# EAGLE board Cing_MainBoard (EAGLE 9.1.0)
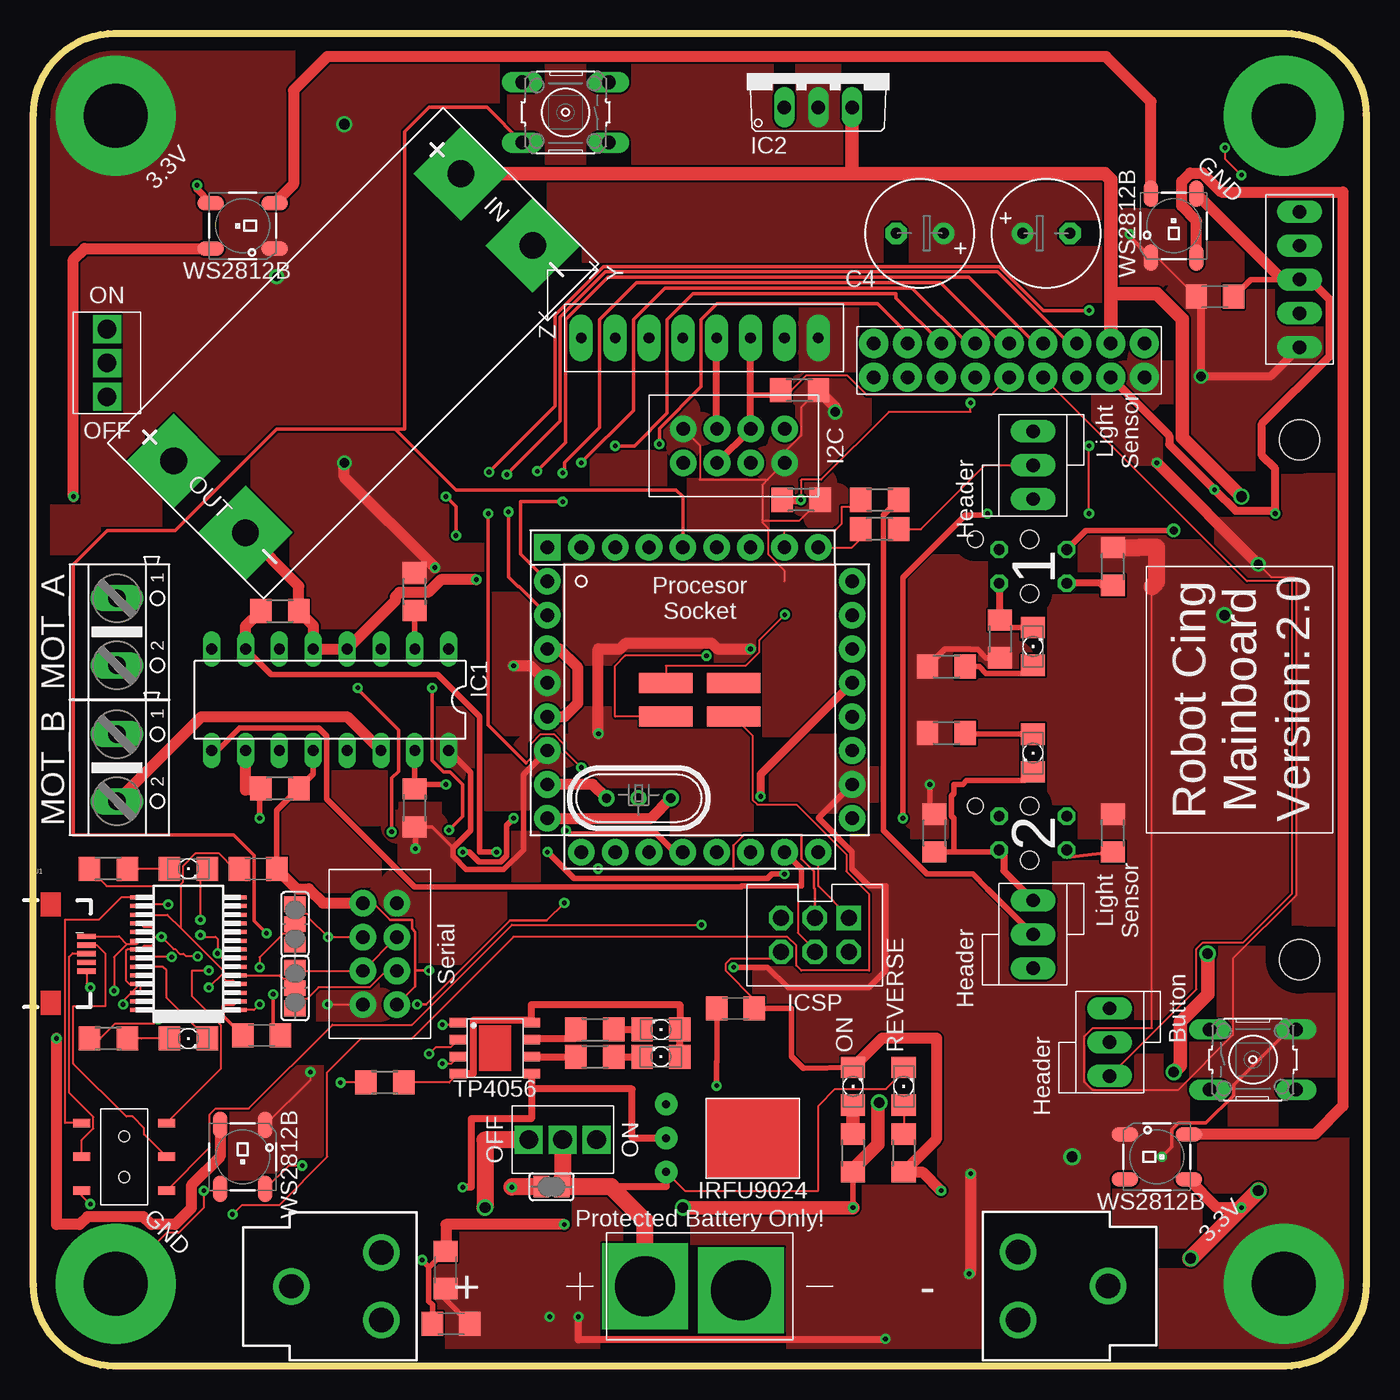
[diagram p0: board, top side]
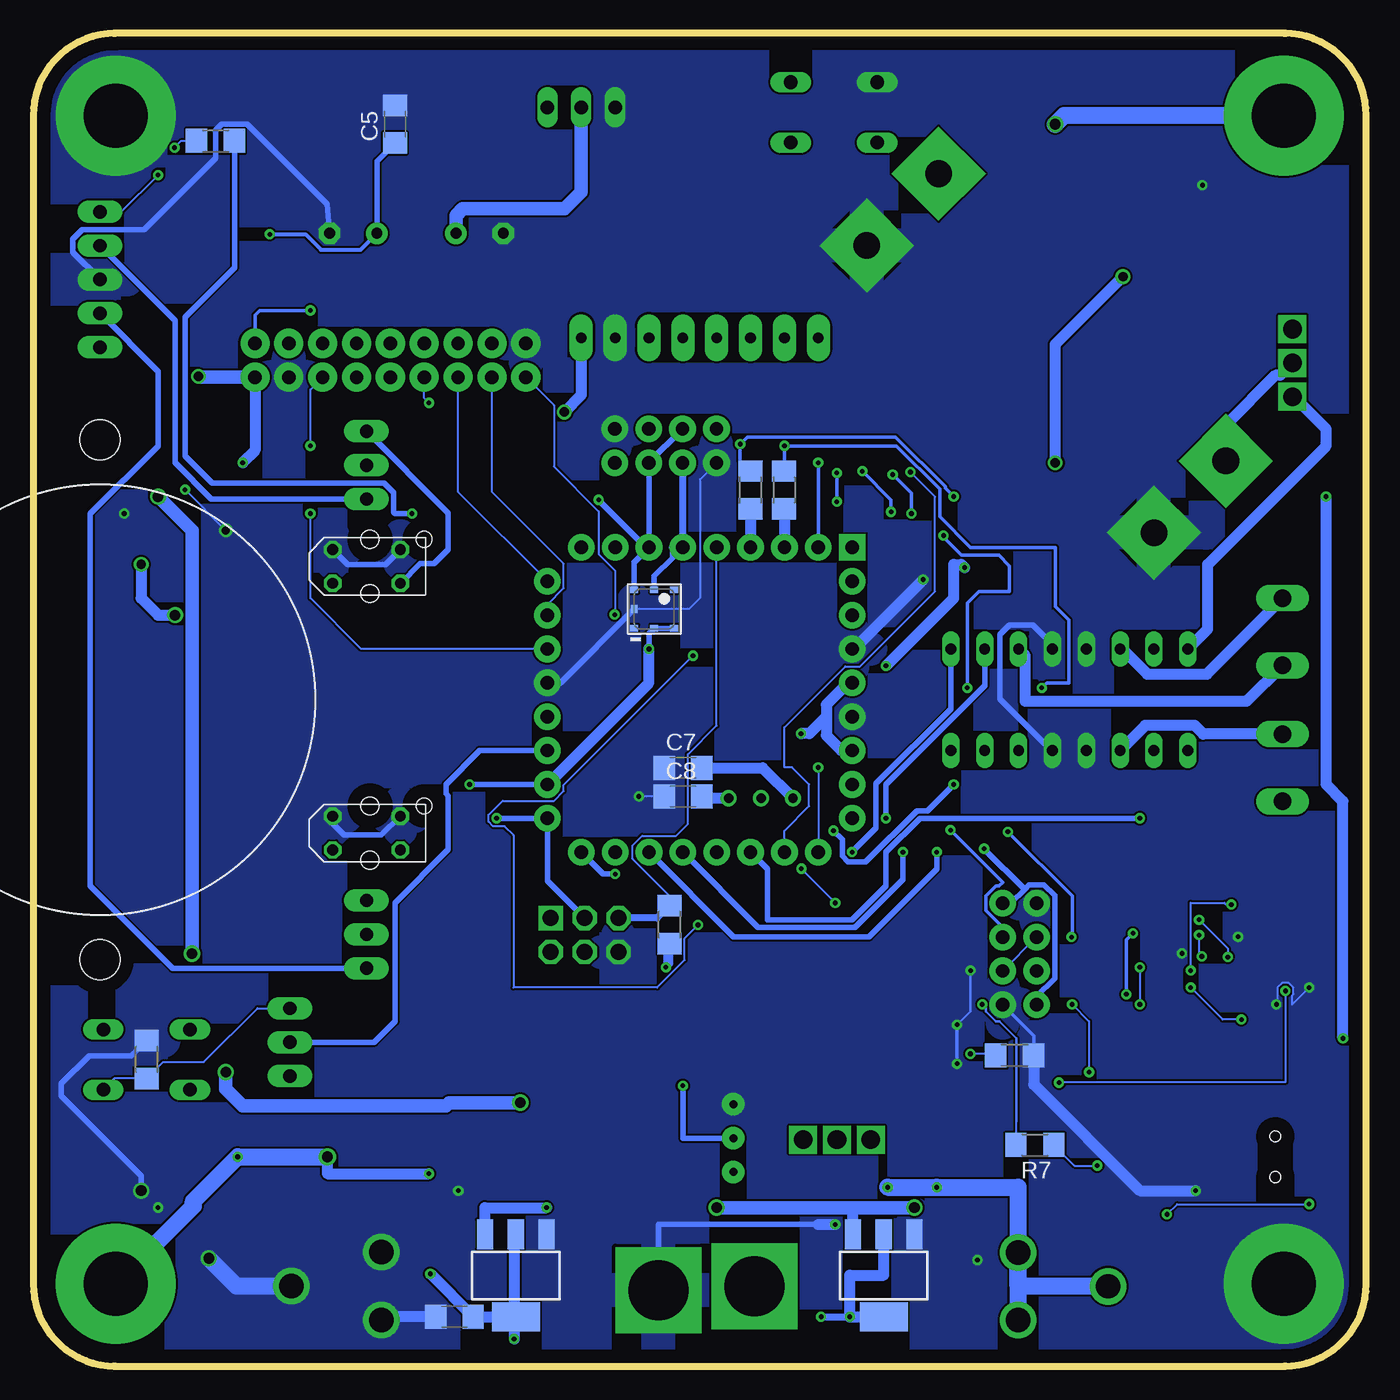
[diagram p1: board, bottom side, seen from below]

Size 100 x 100 mm. Coordinates in mm from the lower left corner, seen from the top.
Outline: 93.84,100 arc-90 100,93.84
Outline: 0,93.84 arc-90 6.16,100
Outline: 6.16,0 arc-90 0,6.16
Outline: 100,6.16 arc-90 93.84,0
Outline: 0,6 0,94
Outline: 6,100 94,100
Outline: 100,94 100,6
Outline: 94,0 6,0
Copper layers (1*16): Top 0.035mm / dielectric 1.5mm / Bottom 0.035mm
Design rules "default": minimum track width 6mil, minimum drill 0.35mm, track to track 6mil, track to pad 6mil, pad to pad 6mil, via to via 6mil, smd to smd 6mil, copper to edge 40mil, drill to drill 6mil, minimum pad ring 10mil, minimum via ring 8mil, stop-mask expansion 4mil, vias tented up to drill 0mil, thermal gap 10mil

## Footprints (pad centres in the part's own frame; a part is rotated, then mirrored left to right if it is on the bottom)
C1206 = smd 1.6 x 1.8: 1 -1.4,0; 2 1.4,0
E3,5-8 = drill 0.813 pad 1.6: + -1.778,0 | drill 0.813 pad 1.6 octagon: - 1.778,0
L293 = drill 0.813 long: 1 -8.89,-3.81; 2 -6.35,-3.81; 3 -3.81,-3.81; 4 -1.27,-3.81; 5 1.27,-3.81; 6 3.81,-3.81; 7 6.35,-3.81; 8 8.89,-3.81; 9 8.89,3.81; 10 6.35,3.81; 11 3.81,3.81; 12 1.27,3.81; 13 -1.27,3.81; 14 -3.81,3.81; 15 -6.35,3.81; 16 -8.89,3.81
LM1117T = drill 1.016 long: 1 -2.54,-2.54; 2 0,-2.54; 3 2.54,-2.54
FT232RL = smd 0.3 x 1.5: 1 -4.225,-3.625; 2 -3.575,-3.625; 3 -2.925,-3.625; 4 -2.275,-3.625; 5 -1.625,-3.625; 6 -0.975,-3.625; 7 -0.325,-3.625; 8 0.325,-3.625; 9 0.975,-3.625; 10 1.625,-3.625; 11 2.275,-3.625; 12 2.925,-3.625; 13 3.575,-3.625; 14 4.225,-3.625; 15 4.225,3.625; 16 3.575,3.625; 17 2.925,3.625; 18 2.275,3.625; 19 1.625,3.625; 20 0.975,3.625; 21 0.325,3.625; 22 -0.325,3.625; 23 -0.975,3.625; 24 -1.625,3.625; 25 -2.275,3.625; 26 -2.925,3.625; 27 -3.575,3.625; 28 -4.225,3.625
IRFU9024 = drill 0.6 pad 1.676: D 0,0; G -2.54,0; S 2.54,0
ICSP_HEADER = drill 1.2 pad 1.829 square: 1 -1.27,2.54 | drill 1.2 pad 1.829 octagon: 2 1.27,2.54; 3 -1.27,0; 4 1.27,0; 5 -1.27,-2.54; 6 1.27,-2.54
1206 = smd 1.6 x 1.803: A -1.422,0; C 1.422,0
WS2812B = smd 2 x 1.1: 1 -2.4,1.7; 2 -2.4,-1.7; 3 2.4,-1.7; 4 2.4,1.7
TCRT5000 = drill 0.8 octagon: A -2.54,1.27; C 2.54,1.27; E 2.54,-1.27; K -2.54,-1.27 | hole 1.35: 0.254,-2.032; 0.254,2.032 | hole 1.2: 4.318,-2.032
AK500/2 = drill 1.321 long: 1 -2.515,0; 2 2.515,0
HC49U = drill 0.7 pad 1.2: 1 -2.413,0; 2 -0.027,0; 3 2.413,0
R1206 = smd 1.6 x 1.803: 1 -1.422,0; 2 1.422,0
B3F-10XX = drill 1.016 long: 1 -3.251,2.261; 2 3.251,2.261; 3 -3.251,-2.261; 4 3.251,-2.261
SJ = smd 1.168 x 1.6: 1 -0.762,0; 2 0.762,0
SJ_2 = smd 1.168 x 1.6: 1 -1.524,0; 2 0,0; 3 1.524,0
USB_SWITCH = smd 1.27 x 0.635: CH1A -3.175,2.54; CH1B -3.175,-2.54; CH2A 3.175,2.54; CH2B 3.175,-2.54; COM1 -3.175,0; COM2 3.175,0 | hole 0.813: 0,1.524; 0,-1.524
TP4056 = smd 1.3 x 0.7: 1 -2.75,1.905; 2 -2.75,0.635; 3 -2.75,-0.635; 4 -2.75,-1.905; 5 2.75,-1.905; 6 2.75,-0.635; 7 2.75,0.635; 8 2.75,1.905
USB-MICRO-SMD = smd 1.4 x 0.4: D+1 2.7,0; D-1 2.7,0.65; GND1 2.7,-1.3; ID1 2.7,-0.65; VBUS1 2.7,1.3
BMP180 = smd 0.6 x 0.5: 1 1.5,1.45; 2 0,1.45; 3 -1.5,1.45; 4 -1.5,-1.45; 5 0,-1.45; 6 1.5,-1.45 | smd 0.5 x 0.6: 7 1.5,0
MPU-6050 = drill 0.8 pad 1.778 long: ADO 0,-6.35; GND 0,6.35; INT 0,-8.89; SCL 0,3.81; SDA 0,1.27; VCC 0,8.89; XCL 0,-3.81; XDA 0,-1.27
PROCESSOR-SOCKET_PCB = smd 4 x 1.5: 32 2.54,1.27; 36 -2.54,1.27; D+ 2.54,-1.27; D- -2.54,-1.27 | drill 1 pad 2: A0 11.43,6.35; A1 11.43,8.89; A2 8.89,11.43; A3 6.35,11.43; A4 3.81,11.43; A5 1.27,11.43; A6 11.43,-3.81; A7 11.43,3.81; AREF 11.43,-1.27; CRYST1 -11.43,-6.35; CRYST2 -11.43,-8.89; D0 -3.81,11.43; D1 -6.35,11.43; D2 -8.89,11.43; D3 -11.43,8.89; D4 -11.43,6.35; D5 -8.89,-11.43; D6 -6.35,-11.43; D7 -3.81,-11.43; D8 -1.27,-11.43; D9 1.27,-11.43; D10 3.81,-11.43; D11 6.35,-11.43; D12 8.89,-11.43; D13 11.43,-8.89; GND -11.43,3.81; GND2 -11.43,-1.27; GND3 11.43,1.27; RESET -1.27,11.43; VCC -11.43,1.27; VCC2 -11.43,-3.81; VCC3 11.43,-6.35 | drill 1 pad 2 square: P$1 -11.43,11.43
BIG_HEADER = drill 1 pad 2.184: +3V3 1.27,10.16; +5V -1.27,7.62; +5V1 1.27,-10.16; A0 1.27,-7.62; A1 1.27,-5.08; A4 1.27,-2.54; A5 1.27,0; A6 1.27,2.54; A7 1.27,5.08; D0 -1.27,-7.62; D1 -1.27,-5.08; D2 -1.27,-2.54; D3 -1.27,0; D4 -1.27,2.54; D5 -1.27,5.08; D6 -1.27,10.16; GND -1.27,-10.16; GND2 1.27,7.62
I2_HEADER = drill 1 pad 2: 5V 1.27,3.81; +5V -1.27,-3.81; GND1 -1.27,3.81; GND2 1.27,-3.81; SCL 1.27,-1.27; SCL2 -1.27,1.27; SDA 1.27,1.27; SDA2 -1.27,-1.27
SERIAL_HEADER = drill 1 pad 2: 5V 1.27,3.81; +5V -1.27,-3.81; GND -1.27,3.81; GND2 1.27,-3.81; RXD -1.27,-1.27; RXD2 1.27,1.27; TXD -1.27,1.27; TXD2 1.27,-1.27
SWITCH = drill 1.4 square: COM 0,0; OFF 2.54,0; ON -2.54,0
BATTERY_CONECTOR_D = drill 4.5 pad 6.452 square: + 4.1,0; - -3.1,0.3
BATTERY_18650-HOLDER = drill 1.829: GND@1 30.628,0.01; GND@2 23.88,2.55; GND@3 23.88,-2.53; PWR@1 -30.628,-0.01; PWR@2 -23.88,2.53; PWR@3 -23.88,-2.55
LM1117 = smd 1.219 x 2.235: 1 -2.311,-3.099; 2 0,-3.099; 3 2.311,-3.099 | smd 3.6 x 2.2: TAB 0,3.099
CONNECTOR_1X5 = drill 1 pad 1.676 long: +5V 0,-5.08; A1 0,5.08; A2 0,2.54; A3 0,-2.54; GND 0,0
CONNECTOR_LIGHT_SENSOR = drill 1 pad 1.676 long: COM 0,0; HEADER 0,-2.54; LIGHTSENSOR 0,2.54
CONNECTOR_BUTTON = drill 1 pad 1.676 long: BUTTON 0,2.54; COM 0,0; HEADER 0,-2.54
LEGO-1X1 = drill 4.8 pad 9: LEGO 0,0
BALL = hole 3: 0,19.5; 0,-19.5
DC-DC-STEP-UP-MT3608 = drill 2 pad 5 square: IN+ 15.24,3.81; IN- 15.24,-3.81; OUT+ -15.24,3.81; OUT- -15.24,-3.81

## Placement (x,y rotation side)
C1  100n  [C1206]  52.69,26.83 0 top
C2  100n  [C1206]  16.87,37.32 0 top
C3  100n  [C1206]  17.12,24.8 0 top
C4  100uf  [E3,5-8]  66.51,85 180 top
C5  100n  [C1206]  72.86,93.18 90 bottom
C6  100uf  [E3,5-8]  76,85 0 top
C7  22p  [C1206]  51.26,44.9 0 bottom
C8  22p  [C1206]  51.26,42.74 0 bottom
C10  100n  [C1206]  31.34,3.19 180 top
C11  100n  [C1206]  68.41,3.72 0 bottom
C12  100n  [C1206]  30.92,7.22 90 top
C13  100n  [C1206]  88.65,80.23 0 top
IC1  L293D  [L293]  22.27,50 180 top
IC2  LM1117T3.3-V  [LM1117T]  58.89,96.99 0 top
IC3  FT232RL  [FT232RL]  11.63,30.95 90 top
IRFU9024  IRFU9024  [IRFU9024]  47.48,17.11 270 top
JP1  ICSP  [ICSP_HEADER]  58.64,32.35 270 top
LED1  Charging  [1206]  47.09,25.25 180 top
LED3  RXD  [1206]  11.63,37.32 0 top
LED5  WS2812B  [WS2812B]  15.71,15.71 270 top
LED6  WS2812B  [WS2812B]  15.71,85.56 180 top
LED7  WS2812B  [WS2812B]  85.56,85.56 90 top
LED8  WS2812B  [WS2812B]  84.29,15.71 0 top
LS1  1  [TCRT5000]  75,60 180 top
LS2  2  [TCRT5000]  75,40 180 top
MOT_A  [AK500/2]  6.27,55.1 270 top
MOT_B  [AK500/2]  6.27,44.9 270 top
ON  GREEN  [1206]  61.5,21 90 top
Q1  16mhz  [HC49U]  45.42,42.61 0 top
R1  10k  [R1206]  52.27,33.12 270 bottom
R2  10k  [R1206]  91.5,23 270 bottom
R3  40  [R1206]  26.37,21.28 0 top
R4  1k2  [R1206]  26.37,23.31 0 bottom
R5  1k  [R1206]  42.13,25.25 180 top
R6  1k  [R1206]  65.3,16 90 top
R7  1k  [R1206]  24.85,16.6 180 bottom
R8  1k  [R1206]  43.67,65.74 90 bottom
R9  1k  [R1206]  46.21,65.74 90 bottom
R10  1k  [R1206]  68.5,52.5 180 top
R11  1k  [R1206]  42.13,23.22 180 top
R12  10k  [R1206]  18.5,43.35 0 top
R13  10k  [R1206]  28.61,41.88 270 top
R14  10k  [R1206]  28.61,58.11 270 top
R15  10k  [R1206]  18.5,56.65 180 top
R16  100  [R1206]  81,40 270 top
R17  1k  [R1206]  67.6,40 270 top
R18  100  [R1206]  81,60 270 top
R19  1k  [R1206]  72.53,54.56 90 top
R20  1k  [R1206]  68.5,47.5 180 top
R22  1k  [R1206]  61.5,16 90 top
R24  330  [R1206]  5.63,37.32 0 top
R25  330  [R1206]  5.63,24.58 0 top
R26  1k  [R1206]  86.33,91.93 180 bottom
R27  1k  [R1206]  63.5,62.8 0 top
R28  1k  [R1206]  63.5,65 180 top
R30  10k  [R1206]  57.48,73.22 0 top
R31  10k  [R1206]  57.61,65 0 top
REVERSE  RED  [1206]  65.3,21 90 top
S2  Reset  [B3F-10XX]  39.93,94.07 180 top
S4  Button  [B3F-10XX]  91.5,23 0 top
SJ1  [SJ]  38.88,13.47 0 top
SJ2  [SJ_2]  19.64,33.15 90 top
SJ3  [SJ_2]  19.64,28.37 90 top
SW1  [USB_SWITCH]  6.82,15.71 180 top
TP4056  TP4056  [TP4056]  34.63,23.86 0 top
TXD  TXD  [1206]  11.63,24.58 0 top
TXD1  LightSensor 1  [1206]  75,54 90 top
TXD2  LightSensor 2  [1206]  75,46 270 top
U1  [USB-MICRO-SMD]  1.3,30.95 0 top
U2  BMP180  [BMP180]  53.42,56.81 180 bottom
U3  MPU-6050MPU6050  [MPU-6050]  50,77.16 270 top
U$1  PROCESSOR-SOCKET_PCB  [PROCESSOR-SOCKET_PCB]  50,50 0 top
U$2  BIG_HEADER  [BIG_HEADER]  73.21,75.47 270 top
U$3  I2C_HEADER  [I2_HEADER]  52.56,69.05 270 top
U$4  SERIAL_HEADER  [SERIAL_HEADER]  26,30.93 180 top
U$5  SWITCH  [SWITCH]  5.53,75.27 90 top
U$7  BATTERY_CONECTOR_D  [BATTERY_CONECTOR_D]  50,6 180 top
U$8  BATTERY_18650-HOLDER  [BATTERY_18650-HOLDER]  50,6 0 top
U$9  SWITCH  [SWITCH]  39.71,17 0 top
U$10  LM1117  [LM1117]  63.8,6.8 180 bottom
U$11  LM1117  [LM1117]  36.2,6.8 180 bottom
U$12  CONNECTOR_1X5  [CONNECTOR_1X5]  95,81.53 0 top
U$13  CONNECTOR_LIGHT_SENSOR  [CONNECTOR_LIGHT_SENSOR]  75,67.6 0 top
U$14  CONNECTOR_LIGHT_SENSOR  [CONNECTOR_LIGHT_SENSOR]  75,32.4 0 top
U$15  CONNECTOR_BUTTON  [CONNECTOR_BUTTON]  80.76,24.31 0 top
U$16  3.3V  [LEGO-1X1]  6.16,93.84 0 top
U$17  3.3V  [LEGO-1X1]  93.84,6.16 0 top
U$18  GND  [LEGO-1X1]  6.16,6.16 0 top
U$19  GND  [LEGO-1X1]  93.84,93.84 0 top
U$20  BALL  [BALL]  95,50 0 top
U$21  DC-DC-STEP-UP-MT3608  [DC-DC-STEP-UP-MT3608]  24,76 45 top
VERSION  2.0  [VERSION]  97.5,50 90 top
YELLOW  Full  [1206]  47.09,23.22 180 top

## Library data of the parts
C1-C8 C10-C13 = rcl; SPICEPREFIX: C
IC1 = Cing Library; MPN: L293D; OC_FARNELL: 9589619; OC_NEWARK: 56P8249
IC2 IC3 IRFU9024 JP1 LED5-LED8 LS1 LS2 SW1 TP4056 U1-U3 U$1-U$5 U$7-U$21 VERSION = Cing Library
LED1 LED3 ON REVERSE TXD TXD1 TXD2 YELLOW = led
MOT_A MOT_B = con-ptr500; OC_FARNELL: unknown; OC_NEWARK: unknown
Q1 = crystal; OC_FARNELL: unknown; OC_NEWARK: unknown
R1-R20 R22 R24-R28 R30 R31 = rcl; SPICEPREFIX: R
S2 S4 = switch-omron; MPN: B3F-1000; OC_FARNELL: 176432; OC_NEWARK: 36M3542
SJ1-SJ3 = jumper

## Nets
36: U$1.36 U$2.+5V1
+3V3: C4.+ C5.1 C6.+ C10.1 C11.2 C12.1 C13.1 IC1.16 IC2.2 LED5.1 LED6.1 LED7.1 LED8.1 R1.2 R10.2 R13.2 R14.1 R16.1 R17.1 R18.1 R19.1 R20.2 R30.2 R31.2 S4.2 U2.2 U2.3 U3.VCC U$1.VCC U$1.VCC2 U$1.VCC3 U$2.+3V3 U$3.5V U$3.+5V U$4.5V U$4.+5V U$10.2 U$10.TAB U$11.2 U$11.TAB U$12.+5V U$16.LEGO U$17.LEGO
A0: U$1.A0 U$2.A0
A1: U$1.A1 U$2.A1
A2: R27.1 U$1.A2
A3: R28.2 U$1.A3
A6: U$1.A6 U$15.COM
ATMEGA_D+: SW1.CH2A U$1.D+
ATMEGA_D-: SW1.CH1A U$1.D-
BAT+: IC2.3 R22.1 U$2.+5V U$9.ON U$10.3 U$11.3 U$21.IN+
BUTTON: R2.2 S4.4 U$15.BUTTON
D2: U$1.D2 U$2.D2
D3: U$1.D3 U$2.D3
D4: U$1.D4 U$2.D4
D5: U$1.D5 U$2.D5
D6: U$1.D6 U$2.D6
D+: IC3.15 SW1.CH2B
D-: IC3.16 SW1.CH1B
GND: C1.2 C2.2 C4.- C5.2 C6.- C7.1 C8.1 C10.2 C11.1 C12.2 C13.2 IC1.4 IC1.5 IC1.12 IC1.13 IC2.1 IC3.7 IC3.18 IC3.21 IC3.25 IC3.26 IRFU9024.G JP1.6 LED5.3 LED6.3 LED7.3 LED8.3 LS1.E LS1.K LS2.E LS2.K ON.C R2.1 R4.2 R6.1 R12.2 R15.1 S2.4 TP4056.1 TP4056.3 U1.GND1 U2.7 U3.GND U$1.GND U$1.GND2 U$1.GND3 U$2.GND U$2.GND2 U$3.GND1 U$3.GND2 U$4.GND U$4.GND2 U$7.- U$8.GND@1 U$8.GND@2 U$8.GND@3 U$10.1 U$11.1 U$12.GND U$18.LEGO U$19.LEGO U$21.IN- U$21.OUT-
HD_A6: U$2.A6 U$15.HEADER
HD_A7: U$1.A7 U$2.A7
IN_A1: IC1.2 R14.2 U$1.D10
IN_A2: IC1.7 R15.2 U$1.D9
IN_B1: IC1.15 R13.1 U$1.D8
IN_B2: IC1.10 R12.1 U$1.D7
IRFU: C1.1 IRFU9024.D SJ1.1 TP4056.5 U$8.PWR@1 U$8.PWR@2 U$8.PWR@3
MISO: IC1.1 JP1.1 U$1.D12
MOSI: IC1.9 JP1.4 U$1.D11
MOT_A+: IC1.3 MOT_A.2
MOT_A-: IC1.6 MOT_A.1
MOT_B+: IC1.14 MOT_B.2
MOT_B-: IC1.11 MOT_B.1
N$1: LED5.2 LED6.4
N$2: LED6.2 LED7.4
N$3: R8.1 U$1.D1
N$4: IC1.8 U$5.ON
N$5: R6.2 REVERSE.A
N$6: R9.1 U$1.D0
N$7: C8.2 Q1.3 U$1.CRYST2
N$8: SW1.COM1 U1.D-1
N$9: LED1.C R5.1
N$10: R28.1 U$14.COM
N$11: LED7.2 LED8.4
N$12: LED5.4 R7.1
N$13: SW1.COM2 U1.D+1
N$14: C7.2 Q1.1 U$1.CRYST1
N$15: R10.1 TXD1.A
N$16: R11.1 YELLOW.C
N$17: R20.1 TXD2.A
N$18: R11.2 TP4056.6
N$19: R5.2 TP4056.7
N$20: LS2.A R16.2
N$22: LS1.A R18.2
N$24: LS1.C R19.2 TXD1.C U$13.LIGHTSENSOR
N$25: LED1.A R3.2 TP4056.4 TP4056.8 YELLOW.A
N$27: R4.1 TP4056.2
N$28: IRFU9024.S REVERSE.C SJ1.2 U$7.+ U$9.COM
N$29: ON.A R22.2
N$31: U$12.A2 U$13.HEADER
N$32: LED3.A R24.2
N$33: IC3.22 LED3.C
N$34: R25.2 TXD.A
N$36: C3.1 IC3.2
N$37: IC3.5 SJ3.2
N$38: IC3.1 SJ2.2
N$39: C2.1 IC3.4 IC3.17 R24.1 R25.1
N$40: U$12.A3 U$14.HEADER
N$42: R26.2 U$12.A1
N$43: R27.2 U$13.COM
N$45: LS2.C R17.2 TXD2.C U$14.LIGHTSENSOR
RESET: C3.2 JP1.5 R1.1 S2.2 U$1.RESET
RXD: R9.2 SJ2.1 SJ3.3 U$2.D0 U$4.RXD U$4.RXD2
SCK: JP1.3 R7.2 R26.1 U$1.D13
SCL: R30.1 U2.5 U3.SCL U$1.A5 U$2.A5 U$3.SCL U$3.SCL2
SDA: R31.1 U2.6 U3.SDA U$1.A4 U$2.A4 U$3.SDA U$3.SDA2
T: IC3.23 TXD.C
TXD: R8.2 SJ2.3 SJ3.1 U$2.D1 U$4.TXD U$4.TXD2
VCC_MOT: U$5.COM U$21.OUT+
VUSB: IC3.20 R3.1 U1.VBUS1

## Tracks (layer width: path | path; a pad name or v marks a point on that pad's centre or on a via)
36  (via drill 0.35)
  Top 0.152: v56.38,56.38 54.45,54.45 54.45,53.55 53.44,52.54 47.46,52.54 U$1.36
  Bottom 0.152: U$2.+5V1 60.94,72.09 60.94,67.5 57.58,64.13 57.58,60.92 56.35,59.69 56.35,56.35 v56.38,56.38
+3V3  (via drill 0.35, 0.7, 0.8, 0.8 pad 1, 0.8 pad 1.3)
  Top 0.152: 87.62,79.86 C13.1 84.32,83.16 LED7.1 | R30.2 57.6,71.91 57.6,69.81 56.37,68.59 U$3.5V 55.09,66.5 | 55.09,66.5 54.7,66.11 54.7,63.55 | R31.2 57.5,63.46 54.7,63.46 54.7,63.55 | 54.7,63.55 54.7,63.3 55.12,62.87 55.12,60.92 56.35,59.69 56.35,58.89 | U$3.+5V 50,69.07 50,66.51 50.01,66.5 55.09,66.5 | U$4.5V 22.08,27.12 v22.06,27.14 | LED5.1 20.79,21.49 v20.79,22.06 | v84.29,67.78 92.88,59.2 94.58,59.2 94.75,59.02 94.75,35.33 90,30.58 90,24.85 85.85,20.7 79.48,20.7 78.86,21.33 78.86,24.75 79.48,25.38 83.94,25.38 83.94,58.49
  Top 0.254: 31.49,38.87 29.9,40.46 R13.2 | S4.2 94.22,25.26 90.05,21.09 90.05,20.31 87.98,18.24 85.9,18.24 85.41,17.75 85.41,16.45 v84.67,15.71
  Top 0.305: LED7.1 82.26,84.76 v82.26,84.92
  Top 0.406: C12.1 30.92,5.01 C10.1 | v28.66,38.82 28.66,40.41 R13.2 | IC1.16 32.8,44.55 32.8,40.19 31.49,38.87 31.49,38.27 32.48,37.28 35.3,37.28 36.76,38.75 36.76,44.38 U$1.VCC2 | R17.1 67.27,41.75 v67.27,43.65 | U$1.VCC3 58.9,41.12 61.43,38.58 61.43,37.3 62.7,36.03 63.97,36.03 63.97,29.68 62.7,28.41 56.6,28.41 55.08,29.93 v52.54,29.93 | R19.1 71.48,53.14 70.87,53.76 70.37,53.76 70.32,53.81 68.39,53.81 R10.2
  Top 0.508: v40.9,3.7 40.9,1.97 64.01,1.97 v63.93,2.05
  Top 0.61: 87.62,79.86 v87.62,74.26 92.81,74.26 U$12.+5V
  Top 0.813: v84.29,67.78 v91.91,60.16 | U$1.VCC 37.3,52.54 v36.03,52.54 | v30.14,59.91 23.33,66.72 v23.33,67.78 | R30.2 60.16,71.97 v60.16,71.59 | v70.32,14.44 70.32,7.04 v70.21,6.93 | v42.4,47.46 42.38,47.48 42.38,53.81 44.02,53.81 44.45,54.24 50.9,54.24 51.33,53.81 v53.81,53.81
  Top 1.27: R18.1 83.01,61.42 83.02,61.43 84.29,61.43 84.29,58.84 83.94,58.49
  Bottom 0.152: v87.62,74.26 87.56,74.2 | v22.06,27.14 20.79,25.87 v20.79,22.06
  Bottom 0.305: v82.26,84.92 79.57,84.92 78.42,83.77 75.45,83.77 C6.+
  Bottom 0.406: v53.81,53.81 53.81,54.97 U2.2 U2.3 | U$4.5V 24.73,27.74 23.37,29.1 23.37,35.3 24.17,36.1 25.29,36.1 25.61,35.77 | U$4.+5V 26.65,34.74 25.61,35.77 | 25.61,35.77 v28.66,38.82 | v67.27,43.65 U$1.VCC3 | R1.2 52.54,31.42 v52.54,29.93 | C5.1 74.22,90.42 C6.+
  Bottom 0.508: v40.9,3.7 v38.74,3.7 | v52.54,29.93 52.27,30.21 R1.2
  Bottom 0.813: U$2.+3V3 83.37,68.7 v84.29,67.78 | v91.91,60.16 91.91,57.62 90.64,56.35 v89.37,56.35 | v36.03,52.54 30.95,57.62 30.95,60.16 30.38,60.16 v30.14,59.91 | 40.51,48.73 40.51,49.63 38.87,51.27 U$1.VCC | 40.51,48.73 40.51,47.32 39.38,46.19 U$1.VCC2 | 40.51,48.73 41.78,47.46 v42.4,47.46 | v23.33,67.78 23.33,76.67 v18.25,81.75 | U3.VCC 58.89,72.86 v60.16,71.59 | U$1.VCC3 53.81,51.27 v53.81,53.81 | U$11.TAB v38.74,3.7 38.74,6.82 36.2,6.82 U$11.2 | 63.93,3.72 C11.2 v70.21,6.93 | 63.93,3.72 63.93,3.57 U$10.TAB 63.93,3.7 v63.93,2.05 | U$10.2 63.93,9.9 63.93,3.72 | v77.94,15.71 77.94,14.44 v70.32,14.44
  Bottom 1.016: U$2.+3V3 87.56,74.2 | IC2.2 58.89,88.1 60.16,86.83 67.78,86.83 68.29,86.32 C4.+
  Bottom 1.27: U$17.LEGO 88,12 88,12.38 v84.67,15.71 v77.94,15.71 | U$16.LEGO 22.68,93.84 v23.33,93.18
  pour Top: -4.61,107.15 107.15,107.15 107.15,-3.34 -7.15,-3.34 -7.15,105.88 -5.88,107.15
A0
  Bottom 0.152: U$1.A0 61.43,57.15 60.2,58.38 60.2,60.2 65.59,65.59 U$2.A0
A1
  Bottom 0.152: U$1.A1 68.13,65.59 U$2.A1
A2
  Top 0.152: U$1.A2 61.43,61.43 62.08,62.08 R27.1
A3
  Top 0.152: U$1.A3 56.35,62.7 60.16,62.7 60.67,63.21 60.67,64.48 61.56,64.48 R28.2
A6
  Bottom 0.406: U$15.COM 74.42,24.31 72.86,25.87 72.86,34.76 68.86,38.76 68.86,42.79 69.05,42.97 69.05,43.65 66.51,46.19 U$1.A6
ATMEGA_D+  (via drill 0.35)
  Top 0.152: U$1.D+ 53.96,47.31 53.96,42.49 54.32,42.13 57.27,42.13 61,38.4 61,37.12 62.7,35.42 62.7,29.68 57.62,29.68 57.24,30.06 57.24,31.55 56.57,32.22 36.03,32.22 28.41,24.6 24.6,24.6 22.06,22.06 22.06,15.71 18.43,12.08 15.64,12.08 v14.95,11.39 | v4.28,12.16 3.65,12.8 SW1.CH2A
  Bottom 0.152: v14.95,11.39 14.18,12.16 v4.28,12.16
ATMEGA_D-  (via drill 0.35)
  Top 0.152: SW1.CH1A 13.23,16.41 13.23,18.88 13.69,19.34 16.16,19.34 22.44,25.62 28.41,25.62 35.9,33.11 v50.13,33.11 | v50.51,53.3 44.41,53.3 43.65,52.54 43.65,48.73 U$1.D-
  Bottom 0.152: v50.13,33.11 51.14,32.1 51.14,30.48 53.21,28.41 63.97,28.41 63.97,39.84 64.63,40.5 65.49,40.5 65.85,40.86 65.85,41.36 64.79,42.42 60.92,42.42 60.2,43.14 60.2,43.61 v50.51,53.3
BAT+  (via drill 0.35, 0.8, 0.8 pad 1)
  Top 0.406: v61.49,11.9 v61.48,11.91 R22.1
  Top 1.016: v61.49,11.9 v48.73,11.9 | R22.1 61.5,14.79 63.36,16.64 63.36,19.67 v63.46,19.77 | v85.56,22.06 86.06,22.56 86.06,25.85 88.1,27.89 v88.1,30.95 | v90.64,65.24 86.19,69.69 86.19,78.58 84.29,80.48 80.83,80.48 | U$2.+5V 80.83,80.48 | 80.83,80.48 80.83,89.02 80.38,89.47 61.43,89.47 | 61.43,89.47 U$21.IN+ | IC2.3 61.43,89.47
  Top 1.27: U$9.ON 34.76,17 34.76,16.98 33.89,16.98 v33.89,11.9
  Bottom 0.813: U$11.3 38.51,11.84 38.57,11.9 | U$10.3 66.11,11.9 v61.49,11.9
  Bottom 1.016: v48.73,11.9 38.57,11.9 v33.89,11.9 | v63.46,19.77 68.8,19.77 69.05,19.52 84.29,19.52 85.56,20.79 v85.56,22.06 | v88.1,30.95 88.1,62.7 v90.64,65.24
BUTTON
  Bottom 0.152: S4.4 93.91,21.58 R2.2 90.26,22.82 87.21,22.82 83.18,26.85 U$15.BUTTON
D2  (via drill 0.35)
  Top 0.254: U$2.D2 70.07,76.74 65.92,80.89 47.38,80.89 45.02,78.53 45.02,71.69 v41.11,67.78
  Bottom 0.254: v41.11,67.78 U$1.D2
D3  (via drill 0.35)
  Top 0.254: U$2.D3 72.61,76.74 68.06,81.29 45.24,81.29 42.48,78.53 42.48,70.42 39.84,67.78 39.84,67.14 v39.71,67.02 | v39.71,64.86 36.54,64.86 36.54,60.92 U$1.D3
  Bottom 0.254: v39.71,67.02 v39.71,64.86
D4  (via drill 0.35)
  Top 0.254: U$2.D4 75.15,76.74 70.19,81.7 43.11,81.7 39.94,78.53 39.94,69.28 v37.81,67.14 | U$1.D4 36.44,58.48 36.37,58.48 35.65,59.2 v35.65,64.1
  Bottom 0.254: v37.81,67.14 35.65,64.99 v35.65,64.1
D5  (via drill 0.35)
  Top 0.152: 36.96,45.26 37.34,45.64 37.34,46.7 38.06,47.42 39.08,47.42 39.8,46.7 39.8,46.23 v41.11,44.92
  Top 0.254: v35.52,66.89 39.53,70.9 39.53,78.7 42.94,82.11 72.32,82.11 77.69,76.74 U$2.D5 | v34.12,63.97 34.12,48.09 36.96,45.26
  Bottom 0.152: v41.11,44.92 U$1.D5
  Bottom 0.254: v35.52,66.89 34.12,65.49 v34.12,63.97
D6  (via drill 0.35)
  Top 0.254: v34.19,67.08 39.13,72.02 39.13,78.87 42.77,82.51 72.49,82.51 75.79,79.21 v79.21,79.21
  Bottom 0.152: U$1.D6 43.65,40.16 41.79,42.02 41.79,43.65 43.06,44.92 43.65,44.92 43.65,47.93 39.08,52.5 37.98,52.5 32.35,58.13 32.35,65.24 v34.19,67.08
  Bottom 0.254: v79.21,79.21 83.02,79.21 83.37,78.86 U$2.D6
D+
  Top 0.152: IC3.15 6.6,35.17 4.91,33.49 2.38,33.49 2.38,24.6 2.38,18.25 SW1.CH2B
D-  (via drill 0.35)
  Top 0.152: 7.36,34.52 IC3.16 8.12,34.63 v10.12,34.63 | SW1.CH1B 14.09,22.34 14.09,25.58 11.9,27.76 11.9,29.68 v13.17,29.68
  Bottom 0.152: v13.17,29.68 13.17,34.76 10.63,34.76 10.5,34.63 v10.12,34.63
GND  (via drill 0.35, 0.6, 0.8 pad 1)
  Top 0.152: IC3.25 7.2,28.68 6.95,28.93 6.95,31.15 7.07,31.27 IC3.21 8.28,31.55 8.85,31.55 8.99,31.68 8.99,32.22 | IC3.18 8.28,32.95 8.85,32.95 8.99,32.82 8.99,32.22 | 8.99,32.22 v9.61,32.22 10.53,31.3 10.63,31.3 10.98,30.95 11.27,30.95 11.47,30.75 v12.33,30.75 | IC3.7 14.17,30.62 v13.82,30.97 13.82,32.07 13.68,32.22 12.66,32.22 v12.53,32.35 | IC3.25 IC3.26 | v30.7,25.62 31.73,25.62 TP4056.1 | v30.7,22.7 31.35,22.7 TP4056.3 | LED5.3 13.87,13.17 v12.79,13.17 12.79,11.89 10.89,9.99 9.99,9.99 U$18.LEGO | IC3.25 6.73,27.39 v6.73,27.14 | U1.GND1 4,28.69 v4.28,28.41 | JP1.6 55.56,30.54 52.29,30.54 51.93,30.18 51.93,29.68 54.09,27.53 C1.2
  Top 0.2: 23.33,34.74 25.5,34.74 26.75,33.49 27.79,33.49 28.41,33.49 28.41,32.83 28.65,32.59 28.65,29.68 28.65,28.5 U$4.GND
  Top 0.203: 28.65,29.68 v29.68,29.68
  Top 0.406: C1.2 56.87,26.83 56.87,23.23 57.77,22.33 ON.C | C10.2 29.94,4.6 29.66,4.88 29.66,7.37 | C12.2 29.66,7.37 | 29.66,7.37 29.66,7.47 v29.17,7.96 | C13.2 91.35,81.53 U$12.GND | IC1.12 21,44.43 R12.2 18.27,41.7 C2.2 | LS1.K 78.97,62.7 v85.56,62.7
  Top 0.508: LED6.3 12.28,88.29 v12.28,88.61
  Top 0.61: U$2.GND2 85.23,69.8 85.23,69.15 v88.62,65.76 90.2,64.18 92.97,64.18 v93.18,63.97 93.18,67.33 92.18,68.33 92.18,70.7 97.26,75.79 97.26,80.03 95.77,81.53 U$12.GND | U$1.GND3 54.57,44.41 v54.57,42.74
  Top 0.813: v90.64,11.9 88.8,11.9 LED8.3 | LED7.3 93.69,81.53 U$12.GND | v68.11,13.17 66.7,14.58 R6.1 67.78,17.06 67.78,24.6 63.68,24.6 ON.C | C2.2 19.77,35.82 20.67,35.82 21.74,34.74 23.33,34.74 U$4.GND2 | v39.84,10.63 30.95,10.63 30.95,8.65 C12.2 | v33.24,59.02 30.59,59.02 29.62,58.05 27.48,58.05 27.15,57.72 27.15,57.42 IC1.4 IC1.5 21,55.56 R15.1 19.92,58.52 U$21.OUT- | U$1.GND2 39.84,48.73 40.86,49.75 40.86,52.41 39.46,53.81 U$1.GND
  Top 1.27: v86.83,8.09 v91.91,13.17
  Bottom 0.152: U$3.GND2 50,66.53 50,57.62 50.81,56.81 U2.7 | v85.56,62.7 v88.62,65.76 | C8.1 v54.57,42.74 | v4.28,28.41 5.55,27.14 5.55,27.81 5.45,27.91 5.45,28.41 5.81,28.76 6.31,28.76 6.66,28.41 6.66,27.2 v6.73,27.14 | v12.33,30.75 12.53,30.95 v12.53,32.35
  Bottom 0.203: v30.7,25.62 29.68,26.63 v29.68,29.68
  Bottom 0.254: R4.2 24.95,24.8 U$4.GND | v30.7,25.62 v30.7,22.7
  Bottom 0.406: U$7.- 53.1,10.63 41.11,10.63 | U2.7 60.46,51.27 U$1.GND3 | v91.91,13.17 91.91,14.29 97.9,20.28 97.9,21.2 95.82,23.28 92.64,23.28 R2.1 | U$12.GND 95,81.54 97.03,83.58 97.03,84.56 96.33,85.26 91.68,85.26 86.32,90.63 86.32,92.72 85.85,93.19 83.96,93.19 77.96,87.18 C6.- | LS1.E 73.57,60.16 76.43,60.16 LS1.K | LS2.E 73.89,39.84 76.67,39.84 77.54,40.71 LS2.K | IC1.13 23.6,46.19 27.48,50.06 27.48,54.89 26.75,55.61 25.02,55.61 23.54,54.13 IC1.4
  Bottom 0.813: 41.11,10.63 v39.84,10.63 | v33.24,59.02 38.44,53.81 U$1.GND | C11.1 73.63,3.72 U$8.GND@3 | R4.2 24.95,21.14 16.98,13.17 v12.79,13.17
  Bottom 1.27: U$8.GND@1 84.75,6.01 v86.83,8.09
  pour Bottom: -7.15,108.42 107.15,108.42 107.15,-3.34 -7.15,-3.34
HD_A6
  Top 0.152: U$15.HEADER 87.27,28.28 87.27,31.3 87.75,31.78 90.77,31.78 94.45,35.46 94.45,58.89 91.06,58.89 U$2.A6
HD_A7  (via drill 0.35)
  Top 0.152: v79.21,63.97 v79.21,69.05
  Bottom 0.152: U$1.A7 75.4,53.81 79.21,57.62 v79.21,63.97 | v79.21,69.05 79.21,73.28 U$2.A7
IN_A1  (via drill 0.35)
  Top 0.406: R14.2 IC1.2 | v32.22,38.57 32.7,38.57 33.43,37.84 35.06,37.84 35.49,38.27 35.49,40.57 v36.03,41.11
  Bottom 0.406: IC1.2 28.62,51.06 36.03,43.65 v36.03,41.11 | v32.22,38.57 32.22,37.3 37.3,32.22 47.46,32.22 U$1.D10
IN_A2  (via drill 0.35)
  Top 0.406: IC1.7 17.83,51.91 30.32,51.91 33.49,48.73 33.49,38.57 v34.76,38.57
  Top 0.813: IC1.7 15.92,55.51 R15.2
  Bottom 0.406: U$1.D9 45.63,32.93 38.34,32.93 34.76,36.51 v34.76,38.57
IN_B1  (via drill 0.35)
  Top 0.406: IC1.15 R13.1 28.96,43.65 v30.95,43.65 | v39.97,40.17 40.21,39.93 46.75,39.93 48.11,38.57 U$1.D8
  Bottom 0.406: v30.95,43.65 32.93,41.67 33.72,41.67 37.55,37.84 38.87,37.84 39.3,38.27 39.3,39.51 v39.97,40.17
IN_B2  (via drill 0.35)
  Top 0.406: R12.1 16.98,43.25 v16.98,41.11
  Top 0.813: R12.1 15.92,43.21 IC1.10
  Bottom 0.406: v16.98,41.11 33.49,41.11 36.03,38.57 36.03,36.03 38.57,33.49 44.92,33.49 44.92,37.3 U$1.D7
IRFU  (via drill 0.35)
  Top 0.406: v51.27,21.04 51.27,22.82 51.28,22.82 C1.1
  Top 0.508: TP4056.5 37.38,20.79 | 37.38,20.79 37.38,18.56 32.85,18.56 32.85,13.42 v32.22,13.42 | IRFU9024.D 44.92,17.11 44.92,20.79 37.38,20.79
  Top 1.27: SJ1.1 35.95,13.47 v35.9,13.42
  Bottom 0.406: IRFU9024.D 51.27,17.11 v51.27,21.04
  Bottom 1.27: v35.9,13.42 v32.22,13.42 26.12,13.42 U$8.PWR@2 | U$8.PWR@2 U$8.PWR@3 | U$8.PWR@1 26.12,5.99 U$8.PWR@2
MISO  (via drill 0.35)
  Top 0.152: JP1.1 61.24,33.68 58.89,36.03 U$1.D12
  Top 0.406: v38.57,38.57 40.55,36.59 55.08,36.59 55.41,36.92 v56.35,36.92
  Bottom 0.406: IC1.1 31.16,49.31 36.76,43.71 36.76,40.38 v38.57,38.57 | v56.35,36.92 57.24,36.92 U$1.D12
MOSI
  Top 0.152: 57.37,36.03 57.37,32.51 58.64,31.24 JP1.4 | 57.62,36.03 57.37,36.03 | 57.37,36.03 56.35,36.03
  Top 0.406: U$1.D11 57.62,37.3 57.62,36.03 57.37,36.03 56.35,36.03 53.19,36.03 53.1,35.94 28.61,35.94 22.02,42.54 22.02,47.27 21.42,47.87 15.5,47.87 13.82,46.19 IC1.9
MOT_A+
  Bottom 0.813: MOT_A.2 8.98,49.87 25.57,49.87 25.57,53.3 IC1.3
MOT_A-
  Bottom 0.813: IC1.6 18.3,53.81 16.42,51.93 11.95,51.93 MOT_A.1
MOT_B+
  Top 0.813: MOT_B.2 12.62,48.73 23.54,48.73 IC1.14
MOT_B-
  Bottom 0.813: MOT_B.1 12.22,47.41 12.88,48.07 16.58,48.07 IC1.11
N$1  (via drill 0.35)
  Top 0.813: LED6.4 3.85,83.86 3.01,83.02 v3.01,65.24 | LED5.2 14.01,15.72 11.85,13.56 11.85,11.85 10.63,10.63 8.85,10.63 8.26,11.22 4.07,11.22 3.48,10.63 1.74,10.63 v1.74,24.6
  Bottom 0.813: v3.01,65.24 3.01,43.65 1.74,42.38 v1.74,24.6
N$2
  Top 0.813: LED7.4 83.86,94.88 80.48,98.26 22.06,98.26 19.52,95.72 19.52,88.67 LED6.2
N$3
  Bottom 0.813: R8.1 43.65,64.3 U$1.D1
N$4
  Bottom 0.813: IC1.8 11.9,55.29 11.9,60.16 3.01,69.05 3.01,70.32 5.55,72.86 5.55,72.75 U$5.ON
N$5
  Top 0.152: REVERSE.A R6.2
N$6
  Bottom 0.813: R9.1 46.19,64.3 U$1.D0
N$7
  Top 0.813: U$1.CRYST2 41.11,41.11 46.33,41.11 Q1.3
  Bottom 0.813: C8.2 49.73,42.61 Q1.3
N$8
  Top 0.152: SW1.COM1 8.32,17.39 8.32,17.85 7.44,18.73 6.97,18.73 3.01,22.7 3.01,27.01 5.42,27.01 5.42,30.95 4.79,31.59 4.02,31.59 U1.D-1
N$9
  Top 0.508: R5.1 LED1.C
N$10
  Top 0.406: U$14.COM 71.59,35.81 71.59,35.82 70.5,36.91 67.06,36.91 63.77,40.21 63.77,63.85 63.98,64.06 R28.1
N$11
  Top 0.813: LED7.2 87.26,85.94 86.15,87.05 86.15,88.87 86.8,89.52 87.72,89.52 89.14,88.1 98.26,88.1 98.26,19.52 96.15,17.41 LED8.4
N$12  (via drill 0.35)
  Top 0.152: v20.18,15.05 19.15,15.05 LED5.4
  Bottom 0.152: R7.1 21.88,15.05 v20.18,15.05
N$13
  Top 0.152: SW1.COM2 3.65,16.97 4.51,17.84 4.51,18.7 2.69,20.52 2.69,30.72 2.95,30.98 3.97,30.98 U1.D+1
N$14
  Top 0.813: Q1.1 41.97,43.65 U$1.CRYST1
  Bottom 0.813: C7.2 45.29,44.9 Q1.1
N$15
  Top 0.406: R10.1 70.97,52.5 71.48,51.98 74.41,51.98 TXD1.A
N$16
  Top 0.508: R11.1 YELLOW.C
N$17
  Top 0.406: TXD2.A 70,47.42 R20.1
N$18
  Top 0.508: TP4056.6 R11.2
N$19
  Top 0.508: TP4056.7 37.38,24.6 40.71,24.6 R5.2
N$20
  Top 0.254: R16.2 77.54,38.18 LS2.A
N$22
  Top 0.508: R18.2 80.2,58.58 80.08,58.75 77.56,58.75 LS1.A
N$24
  Top 0.406: TXD1.C 73.09,55.42 R19.2
  Top 0.508: R19.2 72.53,58.66 LS1.C
  Bottom 0.406: LS1.C 70.98,60.21 69.93,60.21 68.86,61.28 68.86,64 U$13.LIGHTSENSOR
N$25
  Top 0.152: TP4056.4 31.2,21.28 R3.2
  Top 0.508: YELLOW.A LED1.A 48.51,27.14 37.38,27.14 TP4056.8 37.38,25.96 33.02,25.96 33.02,21.95 TP4056.4
N$27  (via drill 0.35)
  Top 0.152: TP4056.2 31.32,23.94 30.2,23.94 v29.7,23.44
  Bottom 0.152: R4.1 27.92,23.44 v29.7,23.44
N$28
  Top 0.152: IRFU9024.S 48.88,13.17 58.89,13.17 58.89,19.52 60.16,20.79 63.97,20.79 65.3,22.12 REVERSE.C
  Top 0.508: IRFU9024.S 47.48,13.47 43.35,13.47
  Top 1.27: U$7.+ 45.9,10.92 43.35,13.47 SJ1.2 39.71,13.47 U$9.COM
N$29
  Top 1.016: R22.2 ON.A
N$31
  Bottom 0.406: U$12.A2 89.37,78.44 89.37,67.78 86.65,65.06 U$13.HEADER
N$32
  Top 0.152: LED3.A R24.2
N$33  (via drill 0.35)
  Top 0.152: LED3.C 12.53,36.8 v12.53,33.49 | v10.38,30.7 8.08,30.7 IC3.22
  Bottom 0.152: v12.53,33.49 10.38,31.33 v10.38,30.7
N$34
  Top 0.152: TXD.A 8.11,24.58 R25.2
N$36
  Top 0.254: IC3.2 15.04,27.15 14.39,27.15 14.23,26.99 14.23,26.3 C3.1
N$37
  Top 0.152: SJ3.2 18.92,29.08 18.74,29.08 18.5,29.32 IC3.5
N$38  (via drill 0.35)
  Top 0.152: SJ2.2 18.92,32.44 18.74,32.44 16.98,30.68 v16.98,29.93 | v16.98,27.14 16.56,26.73 IC3.1
  Bottom 0.152: v16.98,29.93 v16.98,27.14
N$39  (via drill 0.35)
  Top 0.152: IC3.17 10.06,33.88 11.08,32.86 | IC3.4 14.99,28.95 14.41,28.95 14.28,29.08 14.28,29.65 | 11.08,32.86 11.49,32.45 14.28,29.65 | R24.1 5.5,36.03 9.36,36.03 | 9.36,36.03 9.99,36.03 | 11.08,32.86 11.08,34.76 | R25.1 5.03,24.58 6.16,25.71 9.06,25.71 v9.36,26.01 | v13.17,28.41 14.28,29.52 14.28,29.65 | C2.1 15.08,37.32 13.95,38.45 12.16,38.45 11.24,37.53 11.24,36.32 10.95,36.03 | 11.08,34.76 | 11.08,34.76 11.08,35.9 10.95,36.03 | 10.95,36.03 9.36,36.03
  Bottom 0.152: v9.36,26.01 10.77,26.01 v13.17,28.41
N$40
  Bottom 0.406: U$14.HEADER 89.55,29.86 95.72,36.03 95.72,63.97 90.64,69.05 90.64,74.63 U$12.A3
N$42  (via drill 0.35)
  Top 0.152: v90.64,89.37 89.4,90.61 v89.4,91.42
  Bottom 0.152: U$12.A1 93.4,86.61 v90.64,89.37 | v89.4,91.42 88.9,91.93 R26.2
N$43
  Top 0.152: R27.2 66.61,62.8 71.41,67.6 U$13.COM
N$45
  Top 0.152: R17.2 69.05,38.58 72.31,38.58 LS2.C
  Top 0.406: TXD2.C 74.35,43.93 70,43.93 69.73,43.65 69.05,43.65 69.05,42.97 68.86,42.79 68.86,41.28 69.05,41.09 69.05,38.58 | R17.2 72.31,38.58 LS2.C
  Top 0.508: LS2.C 72.8,38.39 72.8,37.16 74.92,35.04 U$14.LIGHTSENSOR
RESET  (via drill 0.35)
  Top 0.254: U$1.RESET 48.73,65.24 48.22,65.75 43.65,65.75 31.71,65.75 27.14,70.32 | C3.2 18,25.33 v18,27.9 | v17.49,32.48 16.55,33.42 16.55,38.34 15.05,39.84 3.01,39.84 3.01,60.16 5.55,62.7 10.63,62.7 18.25,70.32 27.14,70.32 | 27.14,70.32 27.86,70.32 27.86,92.63 29.68,94.45 34.04,94.45 S2.2
  Bottom 0.152: U$1.RESET 48.73,48.05 50.89,45.89 50.89,40.69 51.78,39.8 54.32,39.8 55.04,39.08 55.04,38.06 52.27,35.29 R1.1
  Bottom 0.254: v18,27.9 18,31.98 v17.49,32.48
  Bottom 0.508: JP1.5 53.19,33.62 R1.1
RXD  (via drill 0.35)
  Top 0.152: SJ2.1 SJ3.3 19.87,29.66 U$4.RXD2 U$4.RXD
  Top 0.254: v46.96,69.18 46.96,70.34 50.1,73.48 50.1,78.53 51.29,79.72 63.34,79.72 65.59,77.46 U$2.D0 | v31.18,40.22 32.22,41.26 32.22,43.65 31.28,44.59 30.77,44.59 29.93,45.43 v29.93,50.89 | v31.71,62.32 31.71,64.48 v30.95,65.24
  Bottom 0.254: v31.18,40.22 27.27,36.31 27.56,36.02 27.8,36.02 28.55,35.27 28.55,34.21 27.27,32.93 U$4.RXD | v29.93,50.89 29.93,57.24 29.05,58.13 26.76,58.13 26.76,60.03 27.57,60.85 30.37,60.85 31.59,62.06 31.59,62.19 v31.71,62.32 | v30.95,65.24 31.59,65.88 31.59,65.98 35.31,69.71 46.43,69.71 v46.96,69.18 46.96,67.91 R9.2
SCK  (via drill 0.35)
  Top 0.2: JP1.3 58.64,35.82 58.56,35.89 58.56,37.13 57.64,38.05 57.64,39.82 57.62,39.84 53.31,39.84 52.54,39.07 52.54,37.3 42.4,37.3 v42.38,37.32 | v39.84,34.76 38.52,33.44 35.77,33.44 29.47,27.14 v28.8,27.14
  Top 0.406: v71.59,63.97 71.47,63.85 69.93,63.85 65.24,59.16 v65.24,41.11
  Bottom 0.152: 26.25,18.38 26.28,18.35 R7.2
  Bottom 0.2: v42.38,37.32 39.84,34.78 v39.84,34.76 | 26.25,18.38 26.25,24.59 27.53,25.87 27.79,25.87 28.52,26.6 28.52,26.86 v28.8,27.14
  Bottom 0.406: JP1.3 61.43,36.41 U$1.D13 v65.24,41.11 | R26.1 84.91,82.4 88.61,78.7 88.61,68.29 86.57,66.25 73.67,66.25 72.97,65.55 72.97,64.08 72.86,63.97 v71.59,63.97
SCL
  Top 0.152: R30.1 56.88,73.22 58.01,74.35 61.03,74.35 62.5,72.88 71.89,72.88 U$2.A5
  Top 0.406: R30.1 55.7,72.86 53.81,72.86
  Top 0.508: U$3.SCL U$3.SCL2 53.81,70.34 53.81,72.86 U3.SCL
  Bottom 0.406: 52.05,61.43 52.05,60.64 53.42,59.28 U2.5
  Bottom 0.508: U$3.SCL 51.29,61.43 | 52.05,61.43 51.29,61.43 | 51.29,61.43 U$1.A5
SDA  (via drill 0.35)
  Top 0.152: v70.32,72.27 70.32,71.59 64.18,71.59 59.1,66.51 57.62,66.51 57.59,66.48 v57.59,65
  Top 0.508: U$3.SDA2 51.27,70.34 U3.SDA
  Top 0.61: R31.1 v57.59,65
  Bottom 0.152: v70.32,72.27 70.67,72.62 U$2.A4
  Bottom 0.406: U2.6 54.92,60.16 54.92,60.34 54.9,60.34 U$1.A4 | U$1.A4 54.02,61.43 v57.59,65 | U$1.A4 53.81,67.76 U$3.SDA U$3.SDA2
T
  Top 0.152: TXD.C 9.99,27.64 9.99,29.68 9.7,29.98 IC3.23
TXD  (via drill 0.35)
  Top 0.152: U$4.TXD2 v22.11,32.2 20.66,33.64 20.66,33.83 20.53,33.96 20.35,33.96 SJ2.3 | SJ3.1 20.35,27.56 20.53,27.56 21.4,28.43 25.24,28.43 26.47,29.66 U$4.TXD
  Top 0.254: U$2.D1 64.73,80.14 64.73,80.48 49.51,80.48 47.56,78.53 47.56,71.52 45.09,69.05 v43.65,69.05 | v24.35,50.89 24.35,50.8 27.4,47.75 27.4,44.63 26.89,44.12 v26.89,40.09
  Bottom 0.152: U$4.TXD U$4.TXD2
  Bottom 0.254: v24.35,50.89 23.96,51.27 22.31,51.27 22.31,52.54 22.31,55.97 23.33,56.98 23.33,61.43 29.68,61.43 31.99,63.74 31.99,65.81 35.23,69.05 v43.65,69.05 43.65,67.18 R8.2 | v26.89,40.09 22.06,35.27 22.06,32.25 v22.11,32.2
VCC_MOT
  Bottom 0.813: U$5.COM 6.46,74.34 6.81,74.34 10.53,70.62 U$21.OUT+
VUSB  (via drill 0.35)
  Top 0.152: 7.97,31.97 IC3.20 7.74,31.65 7.02,31.65 | 7.02,31.65 6.06,30.69 v6.06,28.16 | R3.1 v23.04,21.28 | U1.VBUS1 6.42,32.25 7.02,31.65
  Bottom 0.152: v6.06,28.16 6.06,21.3 23.04,21.3 v23.04,21.28